# EAGLE board audio sw (EAGLE 6.5.0)
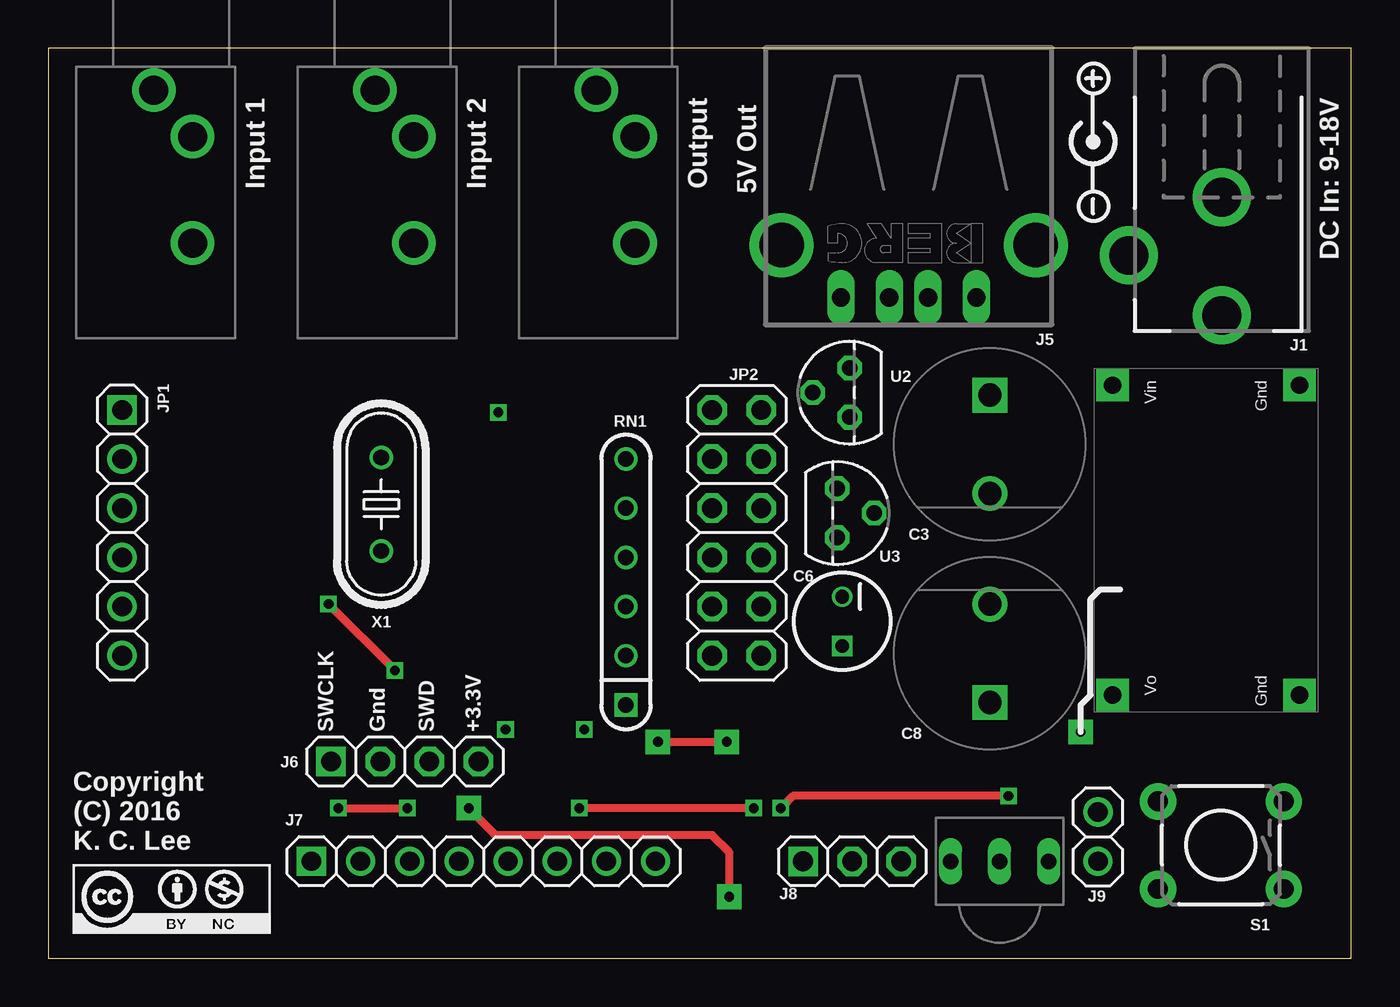
[diagram p0: board, top side]
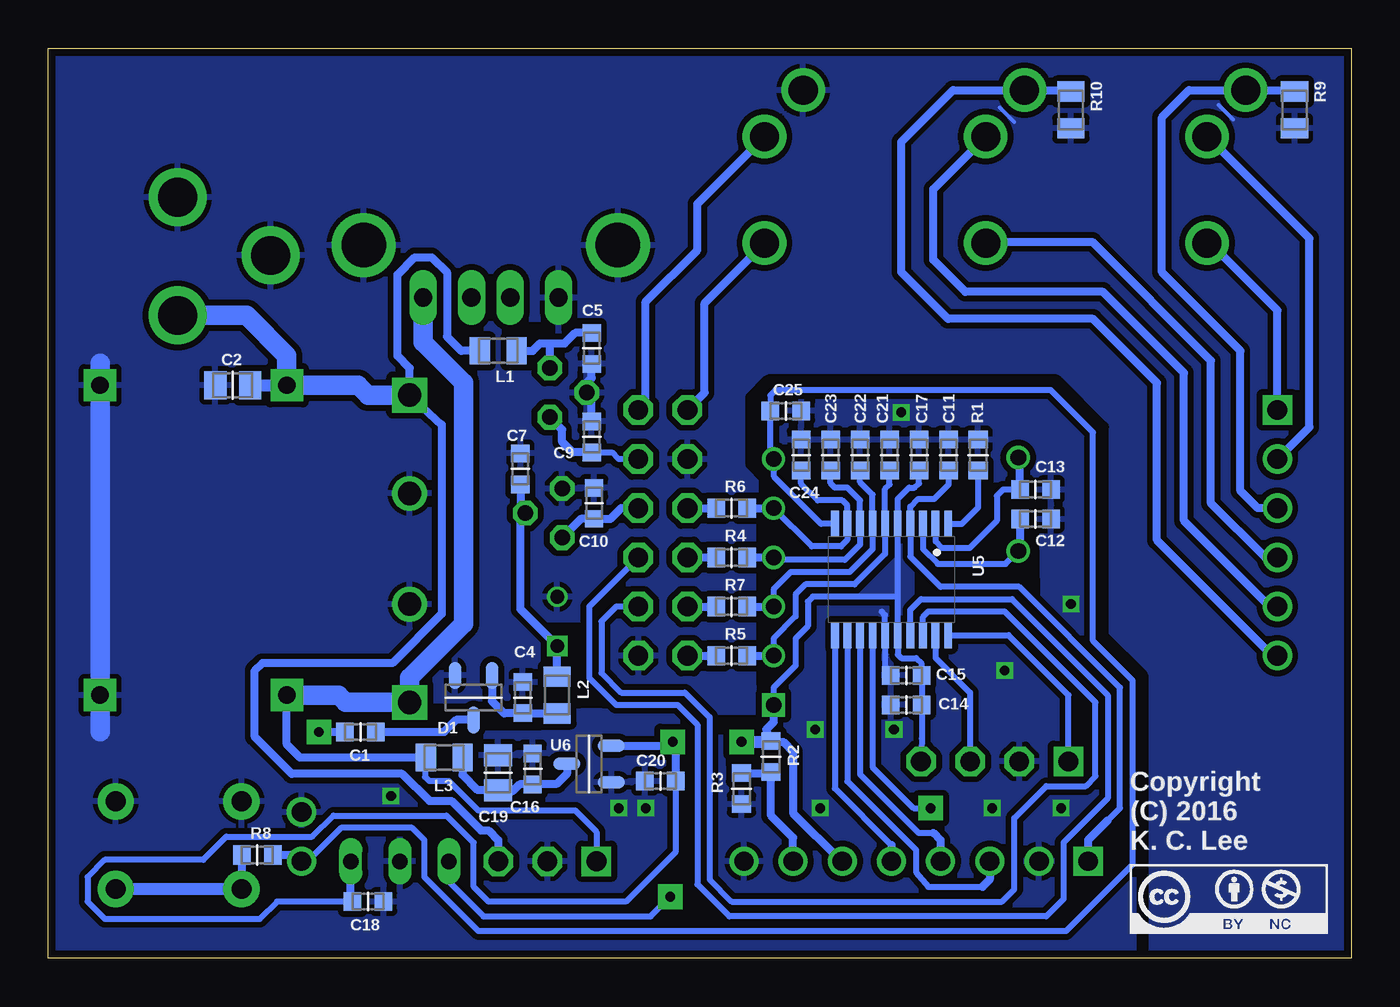
[diagram p1: board, bottom side, seen from below]

Size 67.31 x 46.99 mm. Coordinates in mm from the lower left corner, seen from the top.
Outline: 0,0 67.31,0 67.31,46.99 0,46.99 0,0
Copper layers (1*16): Top 0.0356mm / dielectric 1.5011mm / Bottom 0.0356mm
Design rules "oshpark-2layer": minimum track width 6mil, minimum drill 13mil, track to track 6mil, track to pad 6mil, pad to pad 6mil, via to via 6mil, smd to smd 6mil, copper to edge 15mil, drill to drill 6mil, minimum pad ring 7mil, minimum via ring 7mil, stop-mask expansion 4mil, vias tented up to drill 0mil, thermal gap 10mil
tRestrict: 11 lines
bRestrict: 21 lines

## Footprints (pad centres in the part's own frame; a part is rotated, then mirrored left to right if it is on the bottom)
CAPC1608X92N = smd 0.9 x 0.95: 1 -0.8,0; 2 0.8,0
CAPC2012X145AN = smd 1.15 x 1.45: 1 -0.9,0; 2 0.9,0
CPOL-RADIAL-470UF-25V = drill 1.2 square: + 2.54,0 | drill 1.2: - -2.54,0
CPOL-RADIAL-10UF-25V = drill 0.7 square: 1 1.27,0 | drill 0.7: 2 -1.27,0
SOT95P280X135-3N = smd 1.4 x 0.65: 1 -1.15,0.95; 2 -1.15,-0.95; 3 1.15,0
PJ-102A = drill 2: 1 0,3.1; 2 0,-3; 3 4.8,0
CUI-3MM = drill 1.5: 1 0,-0.9; 2 2.4,1.1; 3 7.9,1.1
PN87520-S = drill 0.95 long: 1 -3.5,2.71; 2 -1,2.71; 3 1,2.71; 4 3.5,2.71 | drill 2.3 pad 2.9: S1 -6.57,0; S2 6.57,0
1X04 = drill 1.016 square: 1 -3.81,0 | drill 1.016 octagon: 2 -1.27,0; 3 1.27,0; 4 3.81,0
1X08 = drill 1 square: 1 -8.89,0 | drill 1: 2 -6.35,0; 3 -3.81,0; 4 -1.27,0; 5 1.27,0; 6 3.81,0; 7 6.35,0; 8 8.89,0
1X03 = drill 1.016 square: 1 -2.54,0 | drill 1.016 octagon: 2 0,0; 3 2.54,0
1X02 = drill 1: 1 -1.27,0 | drill 1.016: 2 1.27,0
1X06 = drill 1.016 square: 1 -6.35,0 | drill 1.016: 2 -3.81,0; 3 -1.27,0; 4 1.27,0; 5 3.81,0; 6 6.35,0
2X06 = drill 1.016 octagon: 1 -6.35,-1.27; 2 -6.35,1.27; 3 -3.81,-1.27; 4 -3.81,1.27; 5 -1.27,-1.27; 6 -1.27,1.27; 7 1.27,-1.27; 8 1.27,1.27; 9 3.81,-1.27; 10 3.81,1.27; 11 6.35,-1.27; 12 6.35,1.27
RESC2012X70N = smd 1.05 x 1.4: 1 -0.95,0; 2 0.95,0
RESC1608X55N = smd 0.9 x 1: 1 -0.8,0; 2 0.8,0
RPACK-SIP-PTH-5 = drill 0.8 square: P$1 0,0 | drill 0.8: P$2 0,-2.54; P$3 0,-5.08; P$4 0,-7.62; P$5 0,-10.16; P$6 0,-12.7
TACTILE-PTH = drill 1.016 pad 1.88: 1 -3.251,2.261; 2 3.251,2.261; 3 -3.251,-2.261; 4 3.251,-2.261
PWR4_THRU = drill 0.9 pad 1.676 square: GND1 -8.001,4.826; GND2 8.001,4.826; VIN -8.001,-4.826; VOUT 8.001,-4.826
TO92-CLP = drill 0.8 pad 1.27 octagon: 1 -1.27,0; 2 0,1.905; 3 1.27,0
AX1838 = drill 0.8 long: 1 -2.54,0; 2 0,0; 3 2.54,0
TSSOP20 = smd 0.4 x 1.35: 1 -2.925,-2.875; 2 -2.275,-2.875; 3 -1.625,-2.875; 4 -0.975,-2.875; 5 -0.325,-2.875; 6 0.325,-2.875; 7 0.975,-2.875; 8 1.625,-2.875; 9 2.275,-2.875; 10 2.925,-2.875; 11 2.925,2.875; 12 2.275,2.875; 13 1.625,2.875; 14 0.975,2.875; 15 0.325,2.875; 16 -0.325,2.875; 17 -0.975,2.875; 18 -1.625,2.875; 19 -2.275,2.875; 20 -2.925,2.875
HC49U-V = drill 0.813: 1 -2.413,0; 2 2.413,0

## Placement (x,y rotation side)
$1_40_$  CC-BY-NC100%  [CC-BY-NC-100]  1.27,1.27 0 top
C1  0.1uF  [CAPC1608X92N]  51.18,11.68 180 bottom
C2  0.1uF  [CAPC2012X145AN]  57.78,29.59 0 bottom
C3  470uF/25V  [CPOL-RADIAL-470UF-25V]  48.64,26.54 90 top
C4  1uF  [CAPC1608X92N]  42.8,13.46 270 bottom
C5  1uF  [CAPC1608X92N]  39.24,31.5 90 bottom
C6  47uF/25V  [CPOL-RADIAL-10UF-25V]  41.02,17.4 270 top
C7  1uF  [CAPC1608X92N]  42.93,25.27 270 bottom
C8  470uF/25V  [CPOL-RADIAL-470UF-25V]  48.64,15.75 270 top
C9  0.1uF  [CAPC1608X92N]  39.24,26.92 270 bottom
C10  0.1uF  [CAPC1608X92N]  39.12,23.5 270 bottom
C11  0.1uF  [CAPC1608X92N]  20.8,25.98 270 bottom
C12  22pF  [CAPC1608X92N]  16.31,22.68 180 bottom
C13  22pF  [CAPC1608X92N]  16.31,24.21 180 bottom
C14  1uF  [CAPC1608X92N]  22.99,13.08 0 bottom
C15  0.1uF  [CAPC1608X92N]  22.99,14.61 0 bottom
C16  1uF  [CAPC1608X92N]  42.29,9.78 270 bottom
C17  1uF  [CAPC1608X92N]  22.33,25.98 270 bottom
C18  0.1uF  [CAPC1608X92N]  50.8,2.92 180 bottom
C19  10uF  [CAPC2012X145AN]  44.07,9.58 270 bottom
C20  1uF  [CAPC1608X92N]  35.69,9.14 0 bottom
C21  1n8  [CAPC1608X92N]  23.85,25.98 270 bottom
C22  1n8  [CAPC1608X92N]  25.37,25.98 270 bottom
C23  1n8  [CAPC1608X92N]  26.9,25.98 270 bottom
C24  1n8  [CAPC1608X92N]  28.42,25.98 270 bottom
C25  1n8  [CAPC1608X92N]  29.21,28.27 180 bottom
D1  [SOT95P280X135-3N]  45.34,13.46 270 bottom
J1  DCJ0202PIN  [PJ-102A]  60.63,36.3 180 top
J2  3.5MM-J3SJI-353  [CUI-3MM]  6.35,44.83 270 top
J3  3.5MM-J3SJI-353  [CUI-3MM]  17.78,44.83 270 top
J4  3.5MM-J3SJI-353  [CUI-3MM]  29.21,44.83 270 top
J5  PN87520-S  [PN87520-S]  44.45,36.83 180 top
J6  [1X04]  18.41,10.16 0 top
J7  PINHD-1X8  [1X08]  22.48,5 0 top
J8  [1X03]  41.53,5 0 top
J9  [1X02]  54.23,6.27 90 top
JP1  [1X06]  3.81,21.97 270 top
JP2  [2X06]  35.56,21.97 270 top
L1  600R  [RESC2012X70N]  44.07,31.37 180 bottom
L2  600R  [RESC2012X70N]  41.02,13.59 270 bottom
L3  600R  [RESC2012X70N]  46.86,10.36 180 bottom
LICENSE1  CC-BY-NC100%  [CC-BY-NC-100]  11.43,1.27 0 bottom
R1  10K  [RESC1608X55N]  19.28,25.98 270 bottom
R2  NC-0R  [RESC1608X55N]  29.97,10.41 90 bottom
R3  475R  [RESC1608X55N]  31.5,8.76 90 bottom
R4  10K  [RESC1608X55N]  32,20.7 0 bottom
R5  10K  [RESC1608X55N]  32,15.62 0 bottom
R6  10K  [RESC1608X55N]  32,23.24 0 bottom
R7  10K  [RESC1608X55N]  32,18.16 0 bottom
R8  10K  [RESC1608X55N]  56.52,5.33 0 bottom
R9  0R  [RESC2012X70N]  2.92,43.81 270 bottom
R10  NC-0R  [RESC2012X70N]  14.48,43.81 270 bottom
RN1  10Kx5  [RPACK-SIP-PTH-5]  29.84,13.08 180 top
S1  [TACTILE-PTH]  60.58,5.84 180 top
U1  BUCK4_THRU  [PWR4_THRU]  59.82,21.59 270 top
U2  LM340LZ-05  [TO92-CLP]  41.4,29.21 90 top
U3  [TO92-CLP]  40.77,22.99 270 top
U4  [AX1838]  49.15,5 0 top
U5  STM32F030F4P6  [TSSOP20]  23.75,19.56 180 bottom
U6  XC6206P332MR  [SOT95P280X135-3N]  39.37,10.03 180 bottom
U$1  POLARITY  [POLARITY]  53.98,42.16 90 top
X1  12MHz  [HC49U-V]  17.2,23.44 270 top

## Library data of the parts
$1_40_$ U$1 = Misc logo; PARTNO: *
C1 C2 C4 C5 C7 C9-C25 = ipc-7351-capacitor; PARTNO: *
C3 C6 C8 = Misc Passives; PARTNO: *
D1 = ipc-7351-diode; PARTNO: *
J1-J4 J6-J9 JP1 = Misc Conn; PARTNO: *
J5 = con-berg; OC_FARNELL: unknown; OC_NEWARK: unknown; PARTNO: *
JP2 = pinhead-1; PARTNO: *
L1-L3 R1-R10 = ipc-7351-resistor; PARTNO: *
LICENSE1 = Misc logo
RN1 = SparkFun-Passives; PARTNO: *
S1 = SparkFun-Electromechanical; PARTNO: *
U1 U6 = Misc Power; PARTNO: *
U2 U3 = linear; PARTNO: *
U4 = Misc opto; PARTNO: *
U5 = Misc Processor; PARTNO: *
X1 = crystal; OC_FARNELL: 1666969; OC_NEWARK: unknown; PARTNO: *

## Nets
!RST: C11.2 J7.1 U5.4
+3.3V: C14.2 C15.2 C17.2 C18.2 C20.2 J6.4 J7.6 R2.2 RN1.P$1 U4.3 U5.5 U5.16 U6.2
+5V: C9.2 JP2.4 U2.1
+5V_SMPS: C8.+ J5.1 J8.1 L3.2 U1.VOUT
-5V: C10.2 JP2.6 U3.3
/LED: J7.7 R2.1 R3.2
AGND: C2.1 C3.- C4.1 C5.1 C6.2 C7.1 C8.- C9.1 C10.1 C11.1 C12.1 C13.1 C14.1 C15.1 C16.1 C17.1 C18.1 C19.1 C20.1 C21.1 C22.1 C23.1 C24.1 C25.1 D1.2 J1.2 J1.3 J4.1 J5.4 J5.S1 J5.S2 J6.2 J7.2 J7.8 J8.2 J9.2 JP2.3 JP2.12 R1.1 R3.1 R9.2 R10.2 S1.3 S1.4 U1.GND1 U1.GND2 U2.2 U3.1 U4.2 U5.15 U6.1
CTRL0: JP2.8 U5.17
CTRL1: JP2.10 U5.18
D/!C: J7.3 U5.12
IR: U4.1 U5.14
L0: JP2.5 R6.1
L1: JP2.9 R7.1
L_OUT: J4.2 JP2.2
MOSI: J7.4 U5.13
N$1: C16.2 C19.2 L3.1 U6.3
N$4: J2.3 JP1.1
N$5: J2.1 JP1.3 R9.1
N$9: J2.2 JP1.2
N$14: J3.3 JP1.4
N$15: J3.1 JP1.6 R10.1
N$19: J3.2 JP1.5
N$22: C5.2 L1.1 U2.3
N$23: R8.1 S1.1 S1.2
N$25: C6.1 C7.2 L2.1 U3.2
N$27: C1.1 D1.3
N$29: C4.2 D1.1 L2.2
N$32: R1.2 U5.1
N$36: C21.2 R5.2 RN1.P$2 U5.6
N$37: C22.2 R7.2 RN1.P$3 U5.7
N$38: C23.2 R4.2 RN1.P$4 U5.8
N$39: C24.2 R6.2 RN1.P$5 U5.9
N$40: C25.2 J9.1 R8.2 RN1.P$6 U5.10
N$41: C13.2 U5.2 X1.1
N$42: C12.2 U5.3 X1.2
R0: JP2.7 R4.1
R1: JP2.11 R5.1
R_OUT: J4.3 JP2.1
SCK: J7.5 U5.11
SWCLK: J6.1 U5.20
SWDIO: J6.3 U5.19
U1_SW: C1.2
VIN: C2.2 C3.+ J1.1 J8.3 L1.2 U1.VIN

## Tracks (layer width: path | path; a pad name or v marks a point on that pad's centre or on a via)
!RST
  Bottom 0.305: 12.57,7.11 11.94,7.75 11.94,13.97 17.14,19.18 21.21,19.18 22.77,20.74 U5.4 22.77,23.33 22.38,23.72 21.54,23.72 20.8,24.46 C11.2
  Bottom 0.406: 12.57,7.11 13.59,6.1 J7.1
+3.3V  (via drill 0.5 pad 1.27)
  Top 0.406: v31.5,11.18 v35.05,11.18
  Bottom 0.305: 23.42,18.8 U5.16 23.42,15.68 23.24,15.49 22.48,15.49 22.19,15.2 C15.2 C14.2 22.19,11.34 J6.4 | 23.42,18.8 U5.5 23.42,23.72 22.84,24.31 22.55,24.31 22.33,24.51 C17.2 | 23.42,18.8 23.55,18.67 27.81,18.67 28.07,18.41 28.07,17.14 28.7,16.51 28.7,15.11 29.84,13.97 RN1.P$1 | C20.2 34.89,5.5 37.47,2.92 44.58,2.92 45.34,3.68 45.34,5.97 46.74,7.37 52.58,7.37 53.67,6.27 58.12,6.27 59.31,5.08 64.39,5.08 65.28,4.19 65.28,2.92 64.39,2.03 56.39,2.03 55.5,2.92 C18.2
  Bottom 0.406: RN1.P$1 29.84,12.19 30.23,11.81 R2.2 30.26,11.18 29.34,11.18 28.83,10.67 28.83,7.49 26.34,5 J7.6 | U6.2 35.24,10.98 v35.05,11.18 34.89,11.14 C20.2 | C18.2 51.69,3.01 U4.3
  Bottom 0.61: v31.5,11.18 30.26,11.18
  pour Bottom (isolate 0.254): 23.5,20.7 25.53,18.67 23.5,18.67 23.5,17.78 22.61,17.78 22.61,21.34 23.5,21.34
+5V
  Bottom 0.305: JP2.4 37.85,25.78 38.19,26.12 C9.2
  Bottom 0.406: C9.2 40.22,26.12 40.77,26.67 40.77,27.3 U2.1
+5V_SMPS
  Bottom 0.305: J8.1 38.99,6.53 40.08,7.62 45.09,7.62 46.61,9.14 47.62,9.14 47.85,9.37 47.85,10.38
  Bottom 0.406: L3.2 47.85,10.38 54.32,10.38 54.99,11.05 U1.VOUT
  Bottom 1.016: J5.1 47.95,31.82 45.85,29.72 45.85,17.27 48.64,14.48 C8.+ 51.94,13.21 52.32,13.59 U1.VOUT
-5V
  Bottom 0.406: JP2.6 37.72,23.24 38.27,22.7 C10.2 39.79,22.7 U3.3
/LED
  Bottom 0.406: J7.7 28.83,6.22 29.97,7.37 R2.1 30.02,9.56 R3.2
AGND  (via drill 0.5)
  Top 0.406: v14.48,18.29 v17.91,14.86 | v14.99,7.75 v18.54,7.75 | v36.45,7.75 v27.43,7.75 | v49.61,8.38 38.48,8.38 v37.85,7.75
  Bottom 0.203: 6.86,44.07 6.1,43.31 | 18.16,43.94 17.4,43.18
  Bottom 0.305: C15.1 24.07,14.77 U5.15 24.07,17.72 24.26,17.91
  Bottom 0.406: C9.1 39.24,28.96 U2.2 39.5,29.72 39.24,29.97 39.24,30.61
  Bottom 1.016: 64.64,30.73 64.64,11.68
  other vias: 23.62,11.81 23.24,28.19 27.69,11.81
  pour Bottom (isolate 0.305, rank 2): 0,46.99 0,0 67.31,0 67.31,46.99
CTRL0
  Bottom 0.305: JP2.8 39.37,18.16 39.37,14.48 37.97,13.08 34.8,13.08 33.78,12.06 33.78,3.81 32.13,2.16 15.75,2.16 14.86,3.05 14.86,5.97 12.57,8.26 12.57,13.59 17.53,18.54 22.23,18.54 22.77,17.99 U5.17
CTRL1
  Bottom 0.305: JP2.10 37.97,18.16 38.73,17.4 38.73,14.73 37.72,13.72 34.42,13.72 33.15,12.45 33.15,4.06 32,2.92 18.03,2.92 17.4,3.56 17.4,7.24 15.75,8.89 13.72,8.89 13.21,9.4 13.21,13.21 17.91,17.91 21.84,17.91 22.12,17.63 U5.18
D/!C
  Bottom 0.305: U5.12 26.02,9.13 22.48,5.59 22.48,4.45 21.84,3.68 19.05,3.68
  Bottom 0.406: J7.3 18.67,4.06 19.05,3.68
IR  (via drill 0.5 pad 1.27)
  Top 0.406: v35.18,3.17 35.18,5.46 34.29,6.35 23.11,6.35 v21.72,7.75
  Bottom 0.305: U5.14 24.72,9.87 22.61,7.75 v21.72,7.75 | U4.1 46.61,3.94 44.83,2.16 36.2,2.16 v35.18,3.17
L0
  Bottom 0.406: JP2.5 R6.1
L1
  Bottom 0.406: JP2.9 R7.1
L_OUT
  Bottom 0.406: JP2.2 36.45,28.7 36.45,33.91 33.78,36.58 33.78,38.96 J4.2
MOSI
  Bottom 0.305: U5.13 25.37,9.5 22.35,6.48 21.59,6.48
  Bottom 0.406: 21.59,6.48 21.21,6.1 J7.4
N$1
  Bottom 0.406: U6.3 40.52,9.52 41.02,9.02 42.2,9.02 C16.2 42.96,8.98 43.32,8.62 C19.2 45.12,8.68 45.91,9.46 L3.1
N$4
  Bottom 0.406: JP1.1 3.81,33.46 7.28,36.93 J2.3
N$5
  Bottom 0.406: JP1.3 4.83,23.24 5.71,24.13 5.71,31.37 9.78,35.43 9.78,43.43 8.38,44.83 J2.1 2.99,44.83 R9.1
N$9
  Bottom 0.406: JP1.2 2.16,27.43 2.16,37.18 7.41,42.43 J2.2
N$14
  Bottom 0.406: JP1.4 4.45,20.7 7.24,23.5 7.24,30.86 13.38,37 18.81,37 J3.3
N$15
  Bottom 0.406: JP1.6 4.06,15.62 10.03,21.59 10.03,29.72 13.34,33.02 20.83,33.02 23.24,35.43 23.24,42.16 20.57,44.83 J3.1 14.54,44.83 R10.1
N$19
  Bottom 0.406: JP1.5 4.19,18.16 8.64,22.61 8.64,30.23 12.83,34.42 19.94,34.42 21.59,36.07 21.59,39.72 J3.2
N$22
  Bottom 0.406: L1.1 42.29,31.37 41.91,31.75 41.4,31.75 | 41.4,31.75 40.64,31.75 40.09,32.3 C5.2 | U2.3 41.4,31.75
N$23
  Bottom 0.305: 57.31,3.57 S1.2
  Bottom 0.406: R8.1 57.31,3.57
  Bottom 0.61: S1.1 S1.2
N$25
  Bottom 0.406: C7.2 42.93,23.24 U3.2 42.93,22.73 42.93,18.03 C6.1 L2.1
N$27
  Bottom 0.406: C1.1 46.86,11.68 46.23,12.31 D1.3
N$29
  Bottom 0.406: L2.2 40.92,12.66 C4.2 42.7,12.64 43.75,12.64 44.39,13.27 D1.1
N$32
  Bottom 0.305: R1.2 19.28,23.27 20.11,22.43 U5.1
N$36
  Bottom 0.305: RN1.P$2 29.84,16.51 28.7,17.65 28.7,18.8 28.19,19.3 25.65,19.3 24.07,20.88 U5.6 24.07,24.24 23.85,24.46 C21.2
  Bottom 0.406: R5.2 RN1.P$2
N$37
  Bottom 0.305: RN1.P$3 29.84,19.05 28.96,19.94 25.91,19.94 24.72,21.12 U5.7 24.72,23.94 25.38,24.59 C22.2
  Bottom 0.406: R7.2 RN1.P$3
N$38
  Bottom 0.305: RN1.P$4 29.72,20.57 26.16,20.57 25.37,21.36 U5.8 25.37,23.65 26.04,24.31 26.67,24.31 26.9,24.54 C23.2 26.82,25.18
  Bottom 0.406: R4.2 RN1.P$4
N$39
  Bottom 0.305: RN1.P$5 27.87,21.27 26.36,21.27 26.02,21.6 U5.9 26.02,23.38 26.29,23.65 27.56,23.65 28.42,24.51 C24.2
  Bottom 0.406: R6.2 RN1.P$5
N$40
  Bottom 0.305: 54.56,5.33 J9.1 53.92,5 52.2,6.73 48.51,6.73 47.88,6.1 47.88,4.19 45.09,1.4 14.73,1.4 11.3,4.83 11.3,14.35 13.34,16.38 13.34,27.15 15.52,29.34 29.74,29.34 30.01,29.07 C25.2 30.01,25.95 RN1.P$6 29.82,25.76 29.82,24.87 27.39,22.43 U5.10
  Bottom 0.406: R8.2 54.56,5.33
N$41
  Bottom 0.305: C13.2 17.98,24.21 18.31,23.88 18.31,22.58 19.71,21.18 21.13,21.18 21.47,21.52 U5.2
  Bottom 0.406: C13.2 17.11,25.77 X1.1
N$42
  Bottom 0.305: U5.3 22.12,21.13 21.36,20.37 17.86,20.37 X1.2
  Bottom 0.406: C12.2 17.11,21.12 X1.2
R0
  Bottom 0.406: JP2.7 R4.1
R1
  Bottom 0.406: JP2.11 R5.1
R_OUT
  Bottom 0.406: JP2.1 33.4,29.21 33.4,33.84 J4.3
SCK
  Bottom 0.305: U5.11 26.67,8.77 23.75,5.84
  Bottom 0.406: 23.75,5.84 J7.5
SWCLK
  Bottom 0.305: J6.1 14.61,13.59 17.7,16.68 U5.20
SWDIO
  Bottom 0.305: U5.19 21.47,15.51 19.68,13.72 J6.3
U1_SW  (via drill 0.5 pad 1.27)
  Bottom 0.406: v53.34,11.68 C1.2
VIN
  Bottom 0.406: L1.2 45.97,31.37 46.71,32.11 46.71,35.43 47.5,36.2 48.39,36.2 49.28,35.31 49.28,31.11 48.64,30.48 C3.+ 46.99,27.56 46.99,17.78 49.53,15.24 56.26,15.24 56.64,14.86 56.64,11.43 54.74,9.53 49.02,9.53 47.62,8.13 46.48,8.13 44.96,6.6 44.58,6.6 44.07,6.1 J8.3
  Bottom 0.61: C2.2 U1.VIN
  Bottom 1.016: C3.+ 50.8,29.08 51.31,29.59 U1.VIN 54.99,31.11 57.07,33.2 J1.1

## Text on the board
tPlace: Input 1 | Input 2 | Output | 5V Out | DC In: 9-18V | SWCLK | Gnd | SWD | +3.3V | Copyright / (C) 2016 / K. C. Lee
bPlace: Copyright / (C) 2016 / K. C. Lee
tDocu: To switching node